# Altium PCB control_circuit.PcbDoc (part 2 of 3)
Units mil, origin at the board's own origin, x right, y up, seen from the top; angles counter-clockwise.
Board outline 3202 x 1176 mil, 2 copper layers (Top Layer, Bottom Layer); 71 components, 80 nets, 328 pads, 216 vias.
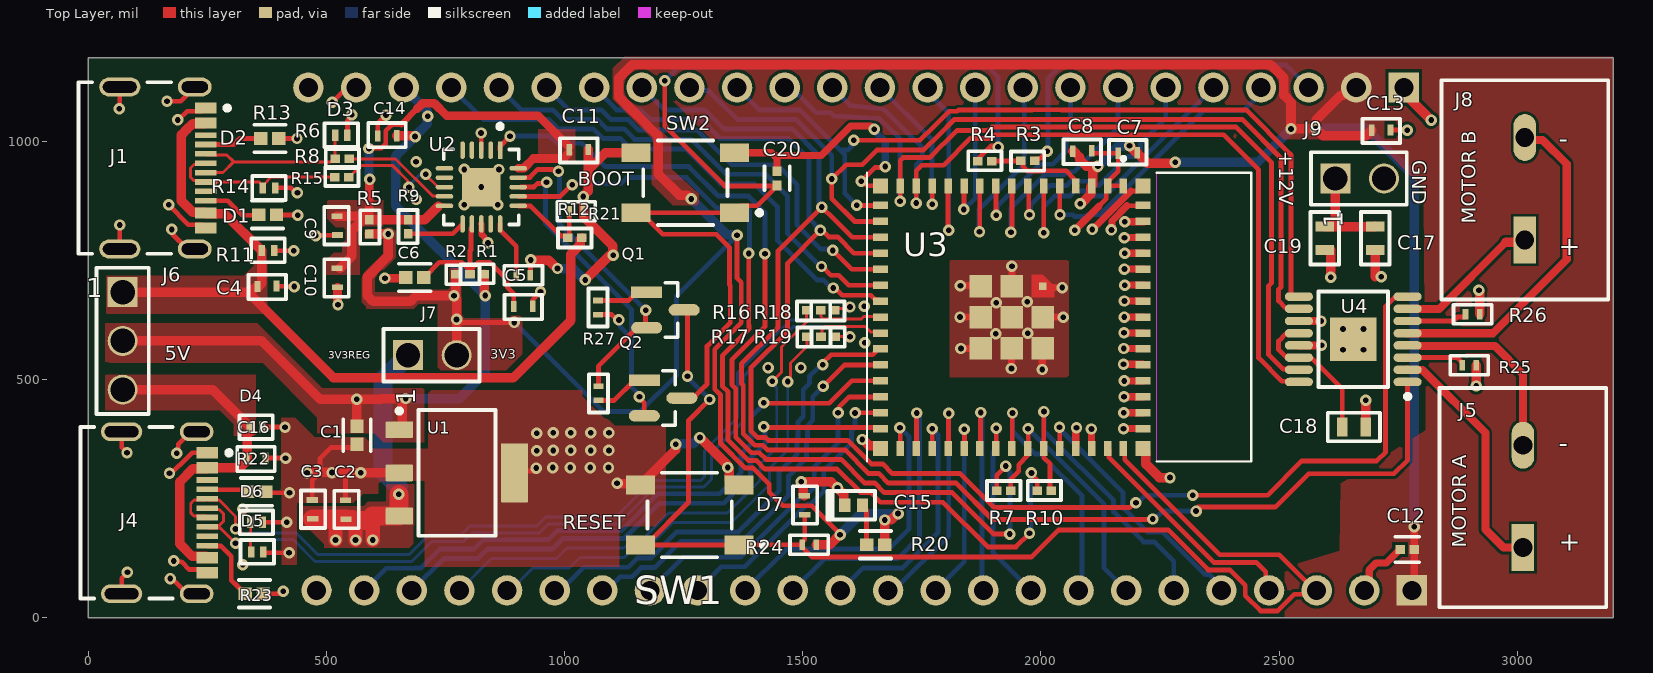
[diagram p0: Top Layer view]

## Via types
v1: diameter 24, hole 12, Top Layer to Bottom Layer, 216 vias

## Nets (pads, with @x,y where several pads share a name; then routed paths per layer and width w, separated by ;. In a path a pad name is that pad's centre, name@x,y a point inside that pad or via, vN(x,y) a via of type N, cw(c..) or ccw(c..) an arc to the next point about the centre after c; other vN are vias at no path point) (continued)
+3V3: (continued)
  Bottom Layer w20: v1(1265.95,879.04) 1341.22,803.77 1361.23,803.77 v1(1362,803) ; v1(1578.21,174.19) 1622.55,218.53 v1(1700,218.53) ; v1(2119.59,947.4) 2162.35,990.16 2185.17,990.16 v1(2185.93,990.92) ; v1(2281.68,956.19) 2455.19,956.19 v1(2525,1026) ; v1(2577,1027) 2682.53,1027 2783.96,925.57 v1(2783.96,190.49)
+3V3_FTDI: C9.2 C10.2 C11.2 R5.2 R9.1 U2.10 U2.20 | length 1173.7
  Top Layer w10: C10.2@522.14,733.29 C10.2@528.04,733.29 ; R5.2@582.98,843 590,835.98 R5.2@590,835 R5.2@585.44,835 ; v1(589,985) 590.22,986.22 616,986.22 624.41,994.63 624.41,1022.25 636.83,1034.67 637.2,1034.67 ; v1@590,919 v1(591,920) ; R9.1@671.74,835.26 R9.1@672,835.53 R9.1@676,835.53 ; U2.10@734.12,863.22 734.12,864.4 734.35,864.63 U2.10@747.62,864.63 ; U2.20@902.38,943.37 U2.20@902.61,943.6 ; C11.2@1009.71,982.14 C11.2@1009.71,988.04
  Top Layer w11: 637.2,1034.67 637.7,1035.17 645.67,1035.17 646.17,1035.67
  Top Layer w12: 646.17,1035.67 657.59,1035.67
  Top Layer w13: 657.59,1035.67 690.91,1069
  Top Layer w14: 576,835 R5.2@585.44,835
  Top Layer w18: R5.2@590,835.98 590,843 v1@590,919 ; 690.91,1069 701.91,1080 726,1080 752,1054 943.75,1054 C11.2@1009.71,988.04 ; U2.20@902.61,943.6 914.06,943.6 934.49,964.02 997.5,964.02 C11.2@1008.8,975.33
  Top Layer w20: C9.2@522,843 576,843 R5.2@582.98,843 ; C10.2@528.04,733.29 553.43,758.68 553.43,812.43 576,835 ; R5.2@590.26,835.26 R9.1@671.74,835.26 ; R9.1@676,835.53 706.42,835.53 U2.10@734.12,863.22
  Bottom Layer w10: v1(589,985) v1@589.14,984.86 ; v1@589.14,921.86 v1(591,920)
  Bottom Layer w18: v1@589.14,921.86 v1@589.14,984.86
+3V3_REG: C2.2 C3.2 J7.1 U1.3 | length 700.3
  Top Layer w10: C3.2@470.86,207.21 C3.2@471.11,206.96 ; C2.2@540.61,206.96 C2.2@540.86,206.71 C2.2@541.77,205.8
  Top Layer w20: v1(651.54,258.73) v1@652.21,258.06 ; U1.3@652.21,214.12 U1.3@652.87,213.45
  Top Layer w30: 505.86,206.96 519,193.82 v1(519,163) ; v1(561,163) 561,199.52 554.72,205.8 567.67,205.8 569.48,204 ; 596.45,213.45 587,204 597,194 v1(597,163)
  Top Layer w40: C3.2@471.11,206.96 505.86,206.96 C2.2@540.61,206.96 ; C2.2@541.77,205.8 554.72,205.8 ; 569.48,204 587,204 ; 596.45,213.45 U1.3@652.87,213.45 ; U1.3@652.21,214.12 v1@652.21,258.06
  Bottom Layer w20: v1(651.54,258.73) 651.54,274.46
  Bottom Layer w40: 651.54,274.46 619,307 619,499 J7.1@671,551
+5V: C1.2 C14.2 J2.22 J6.2 R1.1 U1.1 | length 1768.5
  Top Layer w20: J6.2@72,581 364,581 486.58,458.42 v1(563.53,458.42) ; C1.2@564,401.68 563.53,402.15 v1(563.53,458.42) ; C14.2@647.29,1011.86 683.06,1011.86 684.92,1010 v1(686,1010) ; U1.1@659,394.55 v1@659,460 ; v1(666.07,460) 615.65,460 614.07,458.42 v1(563.53,458.42) ; R1.1@831,721 831,678.3 v1(833.19,676.12)
  Bottom Layer w20: J2.22@662,1113 711.86,1063.14 711.86,1053.29 v1(712.62,1052.53) ; v1(666.07,460) 779,460 833.19,514.19 v1(833.19,676.12) 645,864.3 645,969 v1(686,1010) 686,1011.08 711.8,1036.88 711.8,1051.82 v1(712.62,1052.53)
+5V_BUS1: C4.2 D1.2 J1.A4B9 J1.B4A9 J6.1 R12.2 | length 1767.3
  Top Layer w20: J6.1@72,683.36 334.64,683.36 ; J1.A4B9@246.12,1038.57 244.31,1036.76 218.73,1036.76 207.48,1025.51 195.25,1013.27 195.25,874.88 218.73,851.4 244.31,851.4 J1.B4A9@246.12,849.59 247.93,847.78 286.33,847.78 363.11,771 D1.2@364.41,771 364.41,702.05 357.5,695.14 C4.2@355.21,695.14 352.93,695.14 341.15,683.36 334.64,683.36 ; R12.2@1036,798 1032.31,794.31 1032.31,782.51 1013,763.2 1013,624 892.5,503.5 514.5,503.5 334.64,683.36
+5V_BUS2: C16.2 D4.2 J4.A4B9 J4.B4A9 J6.3 | length 730.8
  Top Layer w20: J6.3@72,478.64 260.77,478.64 D4.2@339.41,400 339.41,391.04 333.33,384.96 C16.2@333.33,335.95 ; J4.B4A9@250,125.67 247,128.67 218.22,128.67 192,154.89 192,285.24 219.59,312.83 220,312.83 248.19,312.83 J4.A4B9@250,314.65 318.44,314.65 332.03,328.23 C16.2@332.03,334.14
+12: C17.2 C19.2 J9.1 | length 212.4
  Top Layer w20: C19.2@2596,821 2596.11,821.11 C19.2@2604.96,821.11 ; J9.1@2618,922 2618,834.14 C19.2@2604.96,821.11 ; C17.2@2702,821.21 2701.89,821.11 C19.2@2604.96,821.11
"+VCC FTDI": C5.2 C6.2 R1.2 R2.2 U2.12 | length 381.7
  Top Layer w10: C6.2@704,714 704.84,714 736.84,746 783.61,746 796.53,733.09 R1.2@796.53,724.86 ; R1.2@802.7,722.64 R2.2@801.06,721 R1.2@801.06,728.14 ; U2.12@803.4,817 803.4,772.1 801.06,769.76 R1.2@801.06,728.14 ; C5.2@893.21,653.14 893.21,679.95 879.57,693.6 879.57,709.52 843.09,746 818.91,746 R1.2@801.06,728.14
"BTN GPIO0": C20.1 Q2.3 R4.2 SW2.1 SW2.2 | length 2218.4
  Top Layer w10: SW2.2@1150,850 SW2.2@1160.83,850 ; v1(1210,1127) 1210,1032.21 1335.86,906.35 1446,906.35 1404.34,864.69 1371.38,864.69 SW2.1@1356.69,850 SW2.2@1160.83,850 ; Q2.3@1246,461 1270,461 1277.18,468.18 1277.18,469.18 1293,485 1294,485 1299,490 1299,570.08 1347.55,618.63 1347.55,697.31 1346,698.86 1346,777.55 1318.55,805 1205.83,805 SW2.2@1160.83,850 ; R4.2@1867.47,958 1867.47,962.47 1876.16,971.16 1876.16,971.41 1882.6,977.86 1882.86,977.86 1895,990 1908.01,990 v1(1910.01,988)
  Bottom Layer w10: v1(1210,1127) 1239,1156 1889,1156 1910.01,1134.99 v1(1910.01,988)
CHIP_PU: C15.2 J3.3 Q1.3 R20.1 SW1.1 SW1.2 U3.45 | length 2755.8
  Top Layer w10: SW1.2@1158.93,152.38 SW1.2@1169.76,152.38 ; Q1.3@1235.43,652.51 1241.94,646 Q1.3@1251,646 1251.35,646 1257.87,639.49 v1(1257.87,506.92) ; v1(1304.18,458) 1260,413.82 1260,242.62 SW1.2@1169.76,152.38 ; C15.2@1503.86,216.21 1503.86,163.31 1498.47,157.92 R20.1@1498.47,153 ; U3.45@2173.21,355.45 2173.21,347.57 2176.09,344.7 2176.09,331.26 2254.34,253 2254.47,253 2282,225.47 2282,225.34 2375.34,132 2500,132 2575,57 J3.3@2579,57 2571.19,49.19 2532,49.19 2496.81,14 2461,14 2429,46 2429,67.81 2396.81,100 2351,100 2267,184 2037,184 2023,170 1980,127 1519.55,127 1498.47,148.08 R20.1@1498.47,153 ; SW1.2@1169.76,152.38 SW1.1@1365.62,152.38 1366.25,153 R20.1@1498.47,153
  Bottom Layer w10: v1(1257.87,506.92) 1257.87,504.32 v1(1304.18,458)
CON1_USB_N: D3.2 J1.A7 J1.B7 R6.2 | length 400.1
  Top Layer w6.23: J1.A7@246.12,934.24 246.57,934.69 282.69,934.69 305,957 ; J1.B7@246.12,973.61 248.91,970.82 291.18,970.82 305,957 ; D3.2@518.2,1013 518.2,963.27 R6.2@518.47,963 512.73,957.26 508.35,957.26 508.1,957 305,957
CON1_USB_P: D2.2 J1.A6 J1.B6 R8.2 | length 378.7
  Top Layer w6.23: J1.A6@246.12,953.92 243.33,951.13 221.58,951.13 214.37,943.92 214.37,924.56 221.58,917.34 243.33,917.34 J1.B6@246.12,914.55 358.78,914.55 D2.2@366.41,906.92 ; D2.2@366.41,902 D2.2@366.41,906.92 ; R8.2@517.47,925 383.41,925 376,917.59 376,916.51 D2.2@366.41,906.92
CON2_USB_N: D6.2 J4.A7 J4.B7 R16.2 | length 1909.6
  Top Layer w6.03: J4.A7@250,210.31 247.19,213.12 221.88,213.12 220,215 215,220 215,239.65 220,244.65 222.23,246.88 247.19,246.88 J4.B7@250,249.69 ; J4.B7@250,249.59 252.79,246.79 274.64,246.79 309,212.43 v1(309,186) 313.65,186 323.53,176.11 337.21,176.11 340.86,179.76 340.86,199.14 D6.2@340,200
  Top Layer w6.23: R16.2@1567.53,645 1571.28,648.75 1595.6,648.75 v1(1599,652.15)
  Bottom Layer w6.23: v1(309,186) 313.65,186 321.53,178.11 435.89,178.11 481.94,132.06 672.94,132.06 715.11,174.23 782.44,174.23 800.27,192.06 940.94,192.06 960.11,211.23 1107.11,211.23 1184.22,288.35 1286.11,288.35 1293.77,296 1293.77,350.89 1362.84,419.96 1362.84,513.96 1473.96,625.09 1577.89,625.09 1584.68,631.88 1584.68,636.29 1599,650.61 v1(1599,652.15)
CON2_USB_P: D5.2 J4.A6 J4.B6 R17.2 | length 1866.2
  Top Layer w6.23: J4.A6@250,230 252.79,227.21 274.54,227.21 284,217.75 284,202.88 274.54,193.42 252.79,193.42 J4.B6@250,190.63 252.79,187.84 277.16,187.84 v1(309,156) 313.81,156 319.69,161.89 337.21,161.89 340.86,158.24 340.86,138.86 D5.2@341.73,138 ; R17.2@1568,590 1568.13,589.87 v1@1598.87,589.87
  Bottom Layer w6.23: v1(309,156) 313.65,156 321.53,163.89 429.99,163.89 476.04,117.83 678.83,117.83 721,160 788.34,160 806.17,177.83 946.83,177.83 966,197 1113,197 1190.12,274.11 1292.01,274.11 1308,290.11 1308,345 1377.07,414.07 1377.07,508.07 1479.86,610.86 1577.89,610.86 v1(1599,589.74)